# Altium PCB PCB1.PcbDoc
Units mil, origin at the board's own origin, x right, y up, seen from the top; angles counter-clockwise.
Board outline 6000 x 4000 mil, 2 copper layers (Top Layer, Bottom Layer); 3 components, 0 nets, 277 pads, 0 vias.
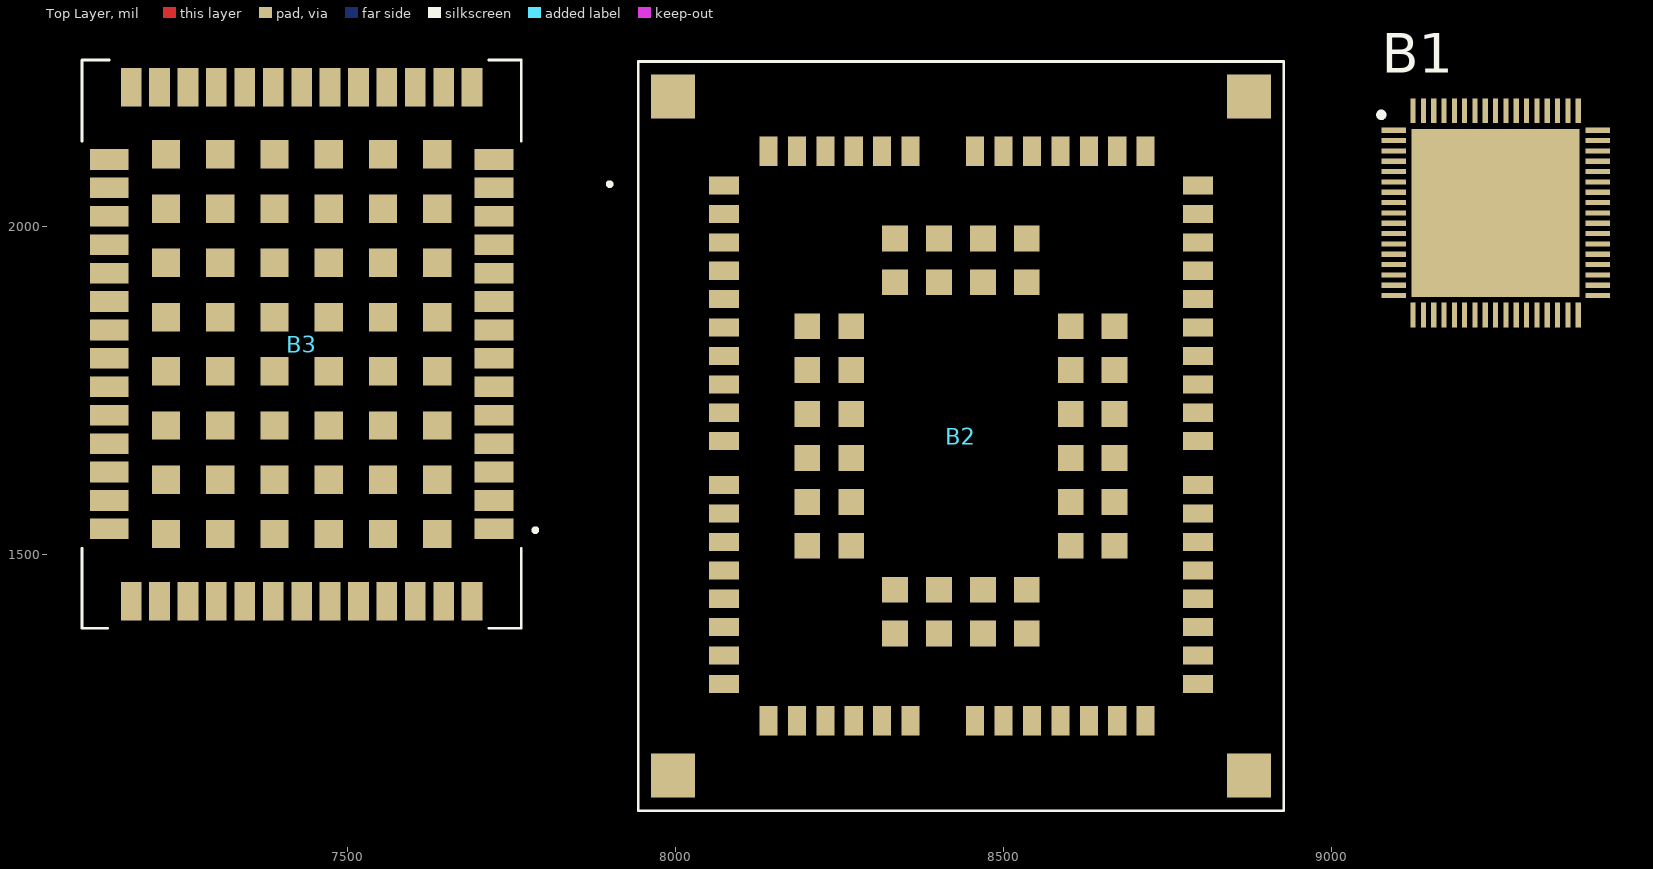
[diagram p0: Top Layer view]
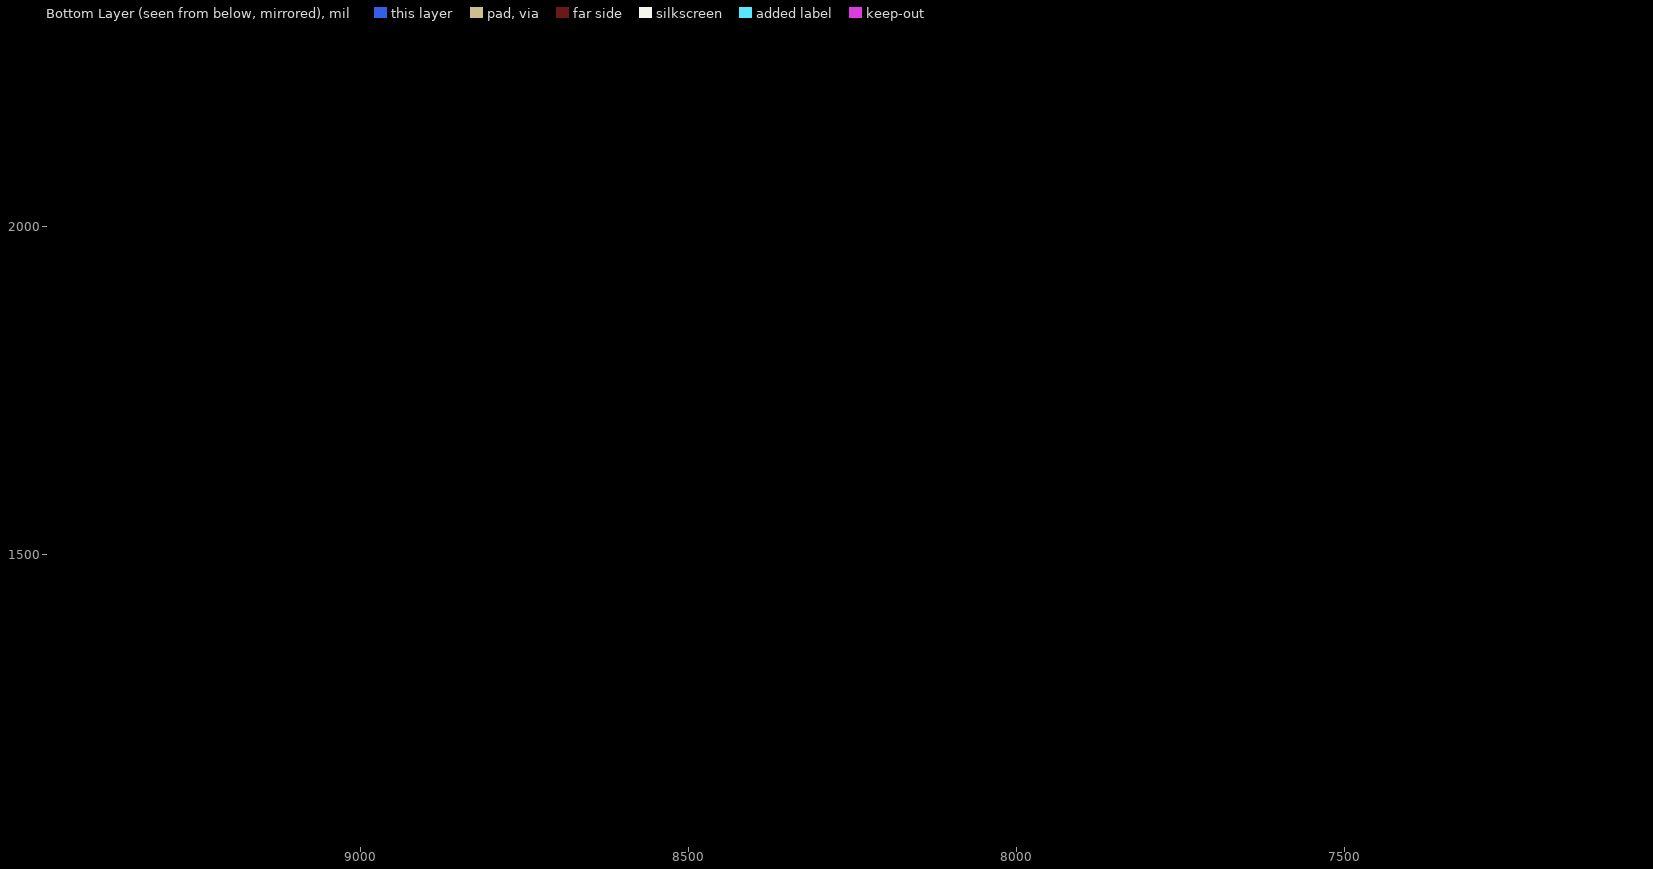
[diagram p1: Bottom Layer view, seen from below]

## Layer stack, top to bottom
Top Solder: solder mask 0.4, Solder Resist, Dk 3.5
Top Layer: signal copper 1.4
Dielectric 1: dielectric 12.6, FR-4, Dk 4.8
Bottom Layer: signal copper 1.4
Bottom Solder: solder mask 0.4, Solder Resist, Dk 3.5

## Board outline
1000,1000 7000,1000 7000,5000 1000,5000

## Design rules (kind name [scope] priority, off if disabled: settings)
Clearance [All] p1: gap=10 ignorepadtopadclearanceinfootprint=FALSE except(0: Arc-Hole Track-Hole SMDPad-Hole THPad-Hole Via-Hole Fill-Hole Poly-Hole Region-Hole Text-Hole)
PolygonConnect [All] p1: connectstyle=Relief reliefconductorwidth=10 reliefentries=4 polygonreliefangle="90 Angle" airgapwidth=10
RoomDefinition Sheet1 [InComponentClass('Sheet1')] p1: confinementstyle=ConfineIn formatcopy=TRUE lockcomponents=FALSE outline 7045,1060 9390,1060 9390,2400 7045,2400
RoutingVias [All] p1: holewidth=28 width=50 viastyle="Through Hole" minholewidth=28 minwidth=50 maxholewidth=28 maxwidth=50
SolderMaskExpansion [All] p1: expansion=4 istentingtop=FALSE
Width [All] p1: maxlimit=10 minlimit=10 preferedwidth=10
30 further rules are at their usual default settings.

## Components (designator, comment, footprint, x,y, rotation, side; value= is the part's Value field where it differs from the comment)
B1 "STM32WB55RCV6" QFN40P800X800X100-69N-D 9250,2020 r0 top
B2 "EG912YEUAA-N06-SNNSA" EG912YEUAAN06SNNSA 8435,1680 r0 top
B3 "ZED-F9P-02B" ZEDF9P02B 7430,1820 r90 top

## Footprints (in the part's own frame and the unit in brackets; to place one, negate y for a bottom-side part, rotate by r counter-clockwise, add the part's x,y. Pads: shape width x height; smd on the part's side, far side on the other; paste and mask are expansions set on the pad)
EG912YEUAAN06SNNSA [mm]
  rect 1.15x0.7 smd: 1(-9.175,9.7) 2(-9.175,8.6) 3(-9.175,7.5) 4(-9.175,6.4) 5(-9.175,5.3) 6(-9.175,4.2) 7(-9.175,3.1) 8(-9.175,2) 9(-9.175,0.9) 10(-9.175,-0.2) 11(-9.175,-1.9) 12(-9.175,-3) 13(-9.175,-4.1) 14(-9.175,-5.2) 15(-9.175,-6.3) 16(-9.175,-7.4) 17(-9.175,-8.5) 18(-9.175,-9.6) 32(9.175,-9.6) 33(9.175,-8.5) 34(9.175,-7.4) 35(9.175,-6.3) 36(9.175,-5.2) 37(9.175,-4.1) 38(9.175,-3) 39(9.175,-1.9) 40(9.175,-0.2) 41(9.175,0.9) 42(9.175,2) 43(9.175,3.1) 44(9.175,4.2) 45(9.175,5.3) 46(9.175,6.4) 47(9.175,7.5) 48(9.175,8.6) 49(9.175,9.7)
  rect 0.7x1.15 smd: 19(-7.45,-11.025) 20(-6.35,-11.025) 21(-5.25,-11.025) 22(-4.15,-11.025) 23(-3.05,-11.025) 24(-1.95,-11.025) 25(0.55,-11.025) 26(1.65,-11.025) 27(2.75,-11.025) 28(3.85,-11.025) 29(4.95,-11.025) 30(6.05,-11.025) 31(7.15,-11.025) 50(7.15,11.025) 51(6.05,11.025) 52(4.95,11.025) 53(3.85,11.025) 54(2.75,11.025) 55(1.65,11.025) 56(0.55,11.025) 57(-1.95,11.025) 58(-3.05,11.025) 59(-4.15,11.025) 60(-5.25,11.025) 61(-6.35,11.025) 62(-7.45,11.025)
  rect 1x1 smd: 63(-5.95,4.25) 64(-5.95,2.55) 65(-5.95,0.85) 66(-5.95,-0.85) 67(-5.95,-2.55) 68(-5.95,-4.25) 69(-2.55,-7.65) 70(-0.85,-7.65) 71(0.85,-7.65) 72(2.55,-7.65) 73(5.95,-4.25) 74(5.95,-2.55) 75(5.95,-0.85) 76(5.95,0.85) 77(5.95,2.55) 78(5.95,4.25) 79(2.55,7.65) 80(0.85,7.65) 81(-0.85,7.65) 82(-2.55,7.65) 83(-4.25,4.25) 84(-4.25,2.55) 85(-4.25,0.85) 86(-4.25,-0.85) 87(-4.25,-2.55) 88(-4.25,-4.25) 89(-2.55,-5.95) 90(-0.85,-5.95) 91(0.85,-5.95) 92(2.55,-5.95) 93(4.25,-4.25) 94(4.25,-2.55) 95(4.25,-0.85) 96(4.25,0.85) 97(4.25,2.55) 98(4.25,4.25) 99(2.55,5.95) 100(0.85,5.95) 101(-0.85,5.95) 102(-2.55,5.95)
  rect 1.7x1.7 smd: 103(-11.15,13.15) 104(-11.15,-13.15) 105(11.15,-13.15) 106(11.15,13.15)
  silkscreen extent -13.65,-14.5 12.5,14.5
QFN40P800X800X100-69N-D [mm]
  rect 0.95x0.2 smd: 1(-3.95,3.2) 2(-3.95,2.8) 3(-3.95,2.4) 4(-3.95,2) 5(-3.95,1.6) 6(-3.95,1.2) 7(-3.95,0.8) 8(-3.95,0.4) 9(-3.95,0) 10(-3.95,-0.4) 11(-3.95,-0.8) 12(-3.95,-1.2) 13(-3.95,-1.6) 14(-3.95,-2) 15(-3.95,-2.4) 16(-3.95,-2.8) 17(-3.95,-3.2) 35(3.95,-3.2) 36(3.95,-2.8) 37(3.95,-2.4) 38(3.95,-2) 39(3.95,-1.6) 40(3.95,-1.2) 41(3.95,-0.8) 42(3.95,-0.4) 43(3.95,0) 44(3.95,0.4) 45(3.95,0.8) 46(3.95,1.2) 47(3.95,1.6) 48(3.95,2) 49(3.95,2.4) 50(3.95,2.8) 51(3.95,3.2)
  rect 0.2x0.95 smd: 18(-3.2,-3.95) 19(-2.8,-3.95) 20(-2.4,-3.95) 21(-2,-3.95) 22(-1.6,-3.95) 23(-1.2,-3.95) 24(-0.8,-3.95) 25(-0.4,-3.95) 26(0,-3.95) 27(0.4,-3.95) 28(0.8,-3.95) 29(1.2,-3.95) 30(1.6,-3.95) 31(2,-3.95) 32(2.4,-3.95) 33(2.8,-3.95) 34(3.2,-3.95) 52(3.2,3.95) 53(2.8,3.95) 54(2.4,3.95) 55(2,3.95) 56(1.6,3.95) 57(1.2,3.95) 58(0.8,3.95) 59(0.4,3.95) 60(0,3.95) 61(-0.4,3.95) 62(-0.8,3.95) 63(-1.2,3.95) 64(-1.6,3.95) 65(-2,3.95) 66(-2.4,3.95) 67(-2.8,3.95) 68(-3.2,3.95)
  rect 6.5x6.5 smd: 69(0,0)
  silkscreen extent -4.52,3.7 -4.33,3.9
ZEDF9P02B [mm]
  rect 0.8x1.5 smd: 1(-7.15,-7.45) 2(-6.05,-7.45) 3(-4.95,-7.45) 4(-3.85,-7.45) 5(-2.75,-7.45) 6(-1.65,-7.45) 7(-0.55,-7.45) 8(0.55,-7.45) 9(1.65,-7.45) 10(2.75,-7.45) 11(3.85,-7.45) 12(4.95,-7.45) 13(6.05,-7.45) 14(7.15,-7.45) 28(7.15,7.45) 29(6.05,7.45) 30(4.95,7.45) 31(3.85,7.45) 32(2.75,7.45) 33(1.65,7.45) 34(0.55,7.45) 35(-0.55,7.45) 36(-1.65,7.45) 37(-2.75,7.45) 38(-3.85,7.45) 39(-4.95,7.45) 40(-6.05,7.45) 41(-7.15,7.45)
  rect 1.5x0.8 smd: 15(9.95,-6.6) 16(9.95,-5.5) 17(9.95,-4.4) 18(9.95,-3.3) 19(9.95,-2.2) 20(9.95,-1.1) 21(9.95,0) 22(9.95,1.1) 23(9.95,2.2) 24(9.95,3.3) 25(9.95,4.4) 26(9.95,5.5) 27(9.95,6.6) 42(-9.95,6.6) 43(-9.95,5.5) 44(-9.95,4.4) 45(-9.95,3.3) 46(-9.95,2.2) 47(-9.95,1.1) 48(-9.95,0) 49(-9.95,-1.1) 50(-9.95,-2.2) 51(-9.95,-3.3) 52(-9.95,-4.4) 53(-9.95,-5.5) 54(-9.95,-6.6)
  rect 1.1x1.1 smd: 55(-7.35,-5.25) 56(-5.25,-5.25) 57(-3.15,-5.25) 58(-1.05,-5.25) 59(1.05,-5.25) 60(3.15,-5.25) 61(5.25,-5.25) 62(7.35,-5.25) 63(7.35,-3.15) 64(5.25,-3.15) 65(3.15,-3.15) 66(1.05,-3.15) 67(-1.05,-3.15) 68(-3.15,-3.15) 69(-5.25,-3.15) 70(-7.35,-3.15) 71(-7.35,-1.05) 72(-5.25,-1.05) 73(-3.15,-1.05) 74(-1.05,-1.05) 75(1.05,-1.05) 76(3.15,-1.05) 77(5.25,-1.05) 78(7.35,-1.05) 79(7.35,1.05) 80(5.25,1.05) 81(3.15,1.05) 82(1.05,1.05) 83(-1.05,1.05) 84(-3.15,1.05) 85(-5.25,1.05) 86(-7.35,1.05) 87(-7.35,3.15) 88(-5.25,3.15) 89(-3.15,3.15) 90(-1.05,3.15) 91(1.05,3.15) 92(3.15,3.15) 93(5.25,3.15) 94(7.35,3.15) 95(7.35,5.25) 96(5.25,5.25) 97(3.15,5.25) 98(1.05,5.25) 99(-1.05,5.25) 100(-3.15,5.25) 101(-5.25,5.25) 102(-7.35,5.25)
  silkscreen extent -11,-9.1 11,8.5

## Part data
B1: "Bluetooth v5.0 and 802.15.4 With Microcontroller Combo module", Manufacturer_Name=STMicroelectronics, Mouser Part Number=511-STM32WB55RCV6, Arrow Part Number=STM32WB55RCV6, Arrow Price/Stock=https://www.arrow.com/en/products/stm32wb55rcv6/stmicroelectronics?region=nac, Datasheet Link=https://www.mouser.com/datasheet/2/389/stm32wb55rc-1588898.pdf, Geometry.Height=1mm, Manufacturer_Part_Number=STM32WB55RCV6, Mouser Price/Stock=https://www.mouser.co.uk/ProductDetail/STMicroelectronics/STM32WB55RCV6?qs=vLWxofP3U2y%2F21YKkPUpfQ%3D%3D
B2: "DESCRIPTION PLACE HOLDER", Manufacturer_Name=Quectel, Mouser Part Number=277-EG912YEUAN6SNNSA, Arrow Part Number=EG912YEUAA-N06-SNNSA, Arrow Price/Stock=https://www.arrow.com/en/products/eg912yeuaa-n06-snnsa/quectel-wireless-solutions-co-ltd?region=nac, Geometry.Height=2.5mm, Manufacturer_Part_Number=EG912YEUAA-N06-SNNSA, Mouser Price/Stock=https://www.mouser.co.uk/ProductDetail/Quectel/EG912YEUAA-N06-SNNSA?qs=zW32dvEIR3tlKTTxnXn4Aw%3D%3D
B3: "MOD RF RECEIVER GNSS 54LGA", Manufacturer_Name=U-Blox, Mouser Part Number=377-ZED-F9P-02B, Datasheet Link=https://www.u-blox.com/sites/default/files/ZED-F9P_DataSheet_%28UBX-17051259%29.pdf, Geometry.Height=2.6mm, Manufacturer_Part_Number=ZED-F9P-02B, Mouser Price/Stock=https://www.mouser.co.uk/ProductDetail/u-blox/ZED-F9P-02B?qs=DPoM0jnrROVJit2O2Grdqw%3D%3D

## Nets (pads, with @x,y where several pads share a name; then routed paths per layer and width w, separated by ;. In a path a pad name is that pad's centre, name@x,y a point inside that pad or via, vN(x,y) a via of type N, cw(c..) or ccw(c..) an arc to the next point about the centre after c; other vN are vias at no path point)
pads on no net: B1.1 B1.2 B1.3 B1.4 B1.5 B1.6 B1.7 B1.8 B1.9 B1.10 B1.11 B1.12 B1.13 B1.14 B1.15 B1.16 B1.17 B1.18 B1.19 B1.20 B1.21 B1.22 B1.23 B1.24 B1.25 B1.26 B1.27 B1.28 B1.29 B1.30 B1.31 B1.32 B1.33 B1.34 B1.35 B1.36 B1.37 B1.38 B1.39 B1.40 B1.41 B1.42 B1.43 B1.44 B1.45 B1.46 B1.47 B1.48 B1.49 B1.50 B1.51 B1.52 B1.53 B1.54 B1.55 B1.56 B1.57 B1.58 B1.59 B1.60 B1.61 B1.62 B1.63 B1.64 B1.65 B1.66 B1.67 B1.68 B1.69 B2.1 B2.2 B2.3 B2.4 B2.5 B2.6 B2.7 B2.8 B2.9 B2.10 B2.11 B2.12 B2.13 B2.14 B2.15 B2.16 B2.17 B2.18 B2.19 B2.20 B2.21 B2.22 B2.23 B2.24 B2.25 B2.26 B2.27 B2.28 B2.29 B2.30 B2.31 B2.32 B2.33 B2.34 B2.35 B2.36 B2.37 B2.38 B2.39 B2.40 B2.41 B2.42 B2.43 B2.44 B2.45 B2.46 B2.47 B2.48 B2.49 B2.50 B2.51 B2.52 B2.53 B2.54 B2.55 B2.56 B2.57 B2.58 B2.59 B2.60 B2.61 B2.62 B2.63 B2.64 B2.65 B2.66 B2.67 B2.68 B2.69 B2.70 B2.71 B2.72 B2.73 B2.74 B2.75 B2.76 B2.77 B2.78 B2.79 B2.80 B2.81 B2.82 B2.83 B2.84 B2.85 B2.86 B2.87 B2.88 B2.89 B2.90 B2.91 B2.92 B2.93 B2.94 B2.95 B2.96 B2.97 B2.98 B2.99 B2.100 B2.101 B2.102 B2.103 B2.104 B2.105 B2.106 B3.1 B3.2 B3.3 B3.4 B3.5 B3.6 B3.7 B3.8 B3.9 B3.10 B3.11 B3.12 B3.13 B3.14 B3.15 B3.16 B3.17 B3.18 B3.19 B3.20 B3.21 B3.22 B3.23 B3.24 B3.25 B3.26 B3.27 B3.28 B3.29 B3.30 B3.31 B3.32 B3.33 B3.34 B3.35 B3.36 B3.37 B3.38 B3.39 B3.40 B3.41 B3.42 B3.43 B3.44 B3.45 B3.46 B3.47 B3.48 B3.49 B3.50 B3.51 B3.52 B3.53 B3.54 B3.55 B3.56 B3.57 B3.58 B3.59 B3.60 B3.61 B3.62 B3.63 B3.64 B3.65 B3.66 B3.67 B3.68 B3.69 B3.70 B3.71 B3.72 B3.73 B3.74 B3.75 B3.76 B3.77 B3.78 B3.79 B3.80 B3.81 B3.82 B3.83 B3.84 B3.85 B3.86 B3.87 B3.88 B3.89 B3.90 B3.91 B3.92 B3.93 B3.94 B3.95 B3.96 B3.97 B3.98 B3.99 B3.100 B3.101 B3.102